# Altium PCB OpenTag3.PcbDoc
Units mil, origin at the board's own origin, x right, y up, seen from the top; angles counter-clockwise.
Board outline 2748.78 x 1260.03 mil, 4 copper layers (Top Layer, Internal Plane 1, Internal Plane 2, Bottom Layer), stack 30.634 mil thick; 62 components, 47 nets, 244 pads, 66 vias.
Unrouted connection lines stored in the file: 1.
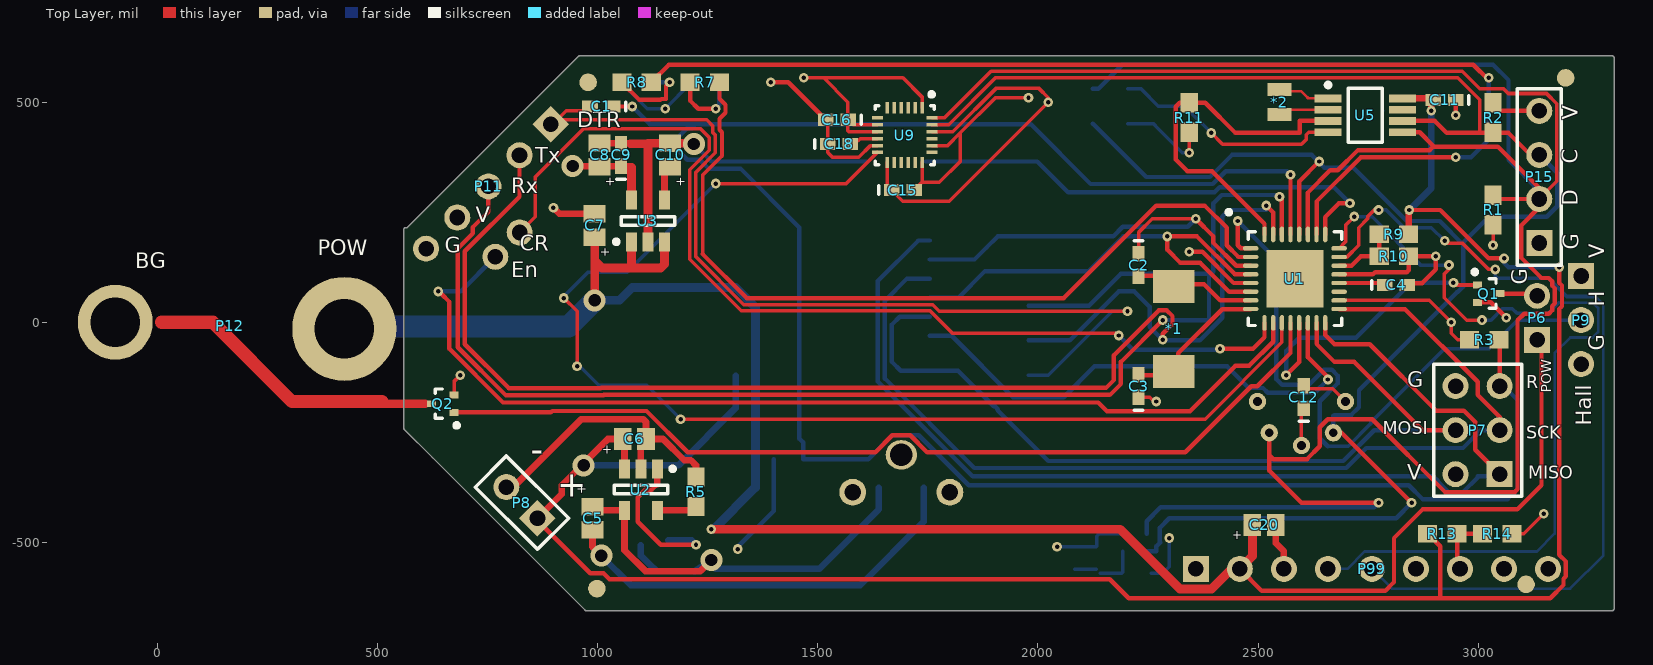
[diagram p0: Top Layer view]
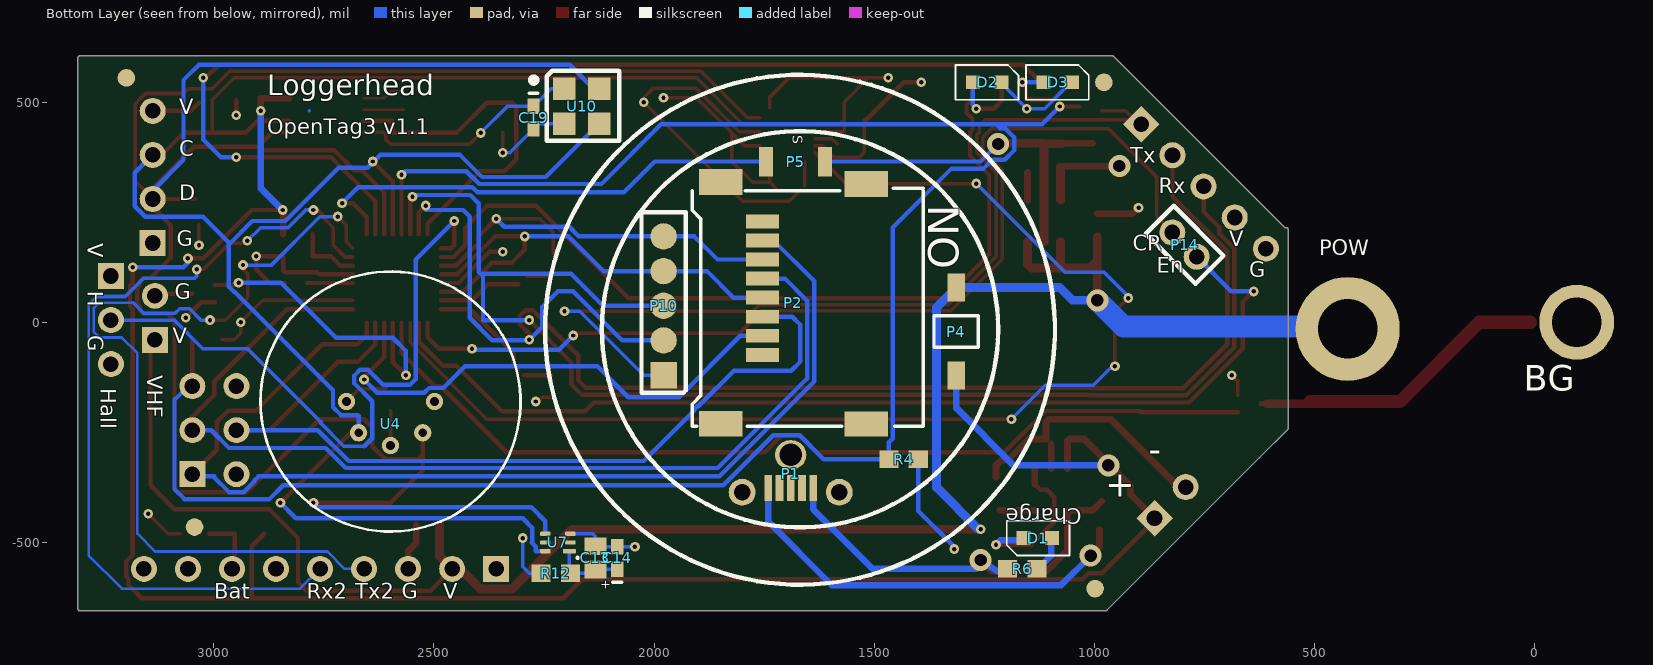
[diagram p1: Bottom Layer view, seen from below]
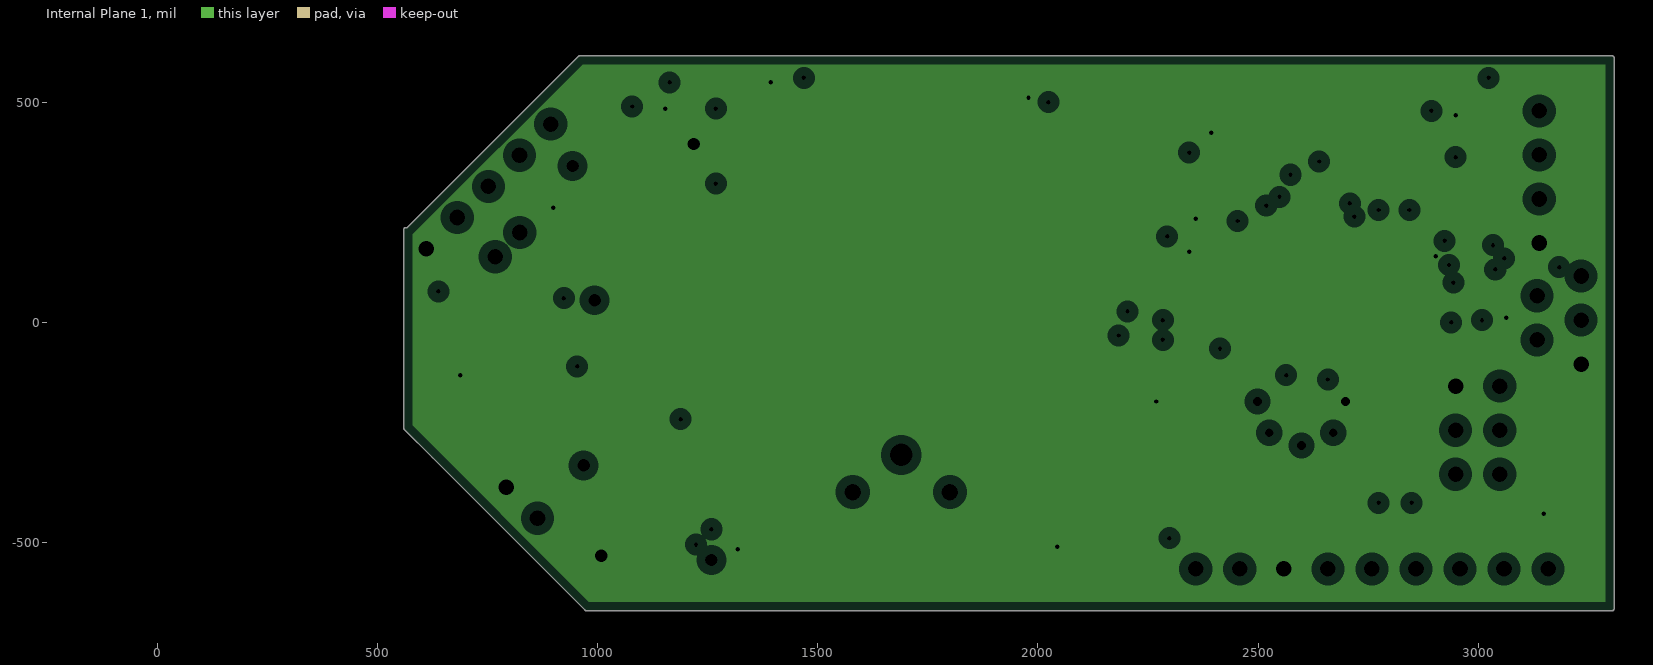
[diagram p2: Internal Plane 1, clearances drawn from the general rule]
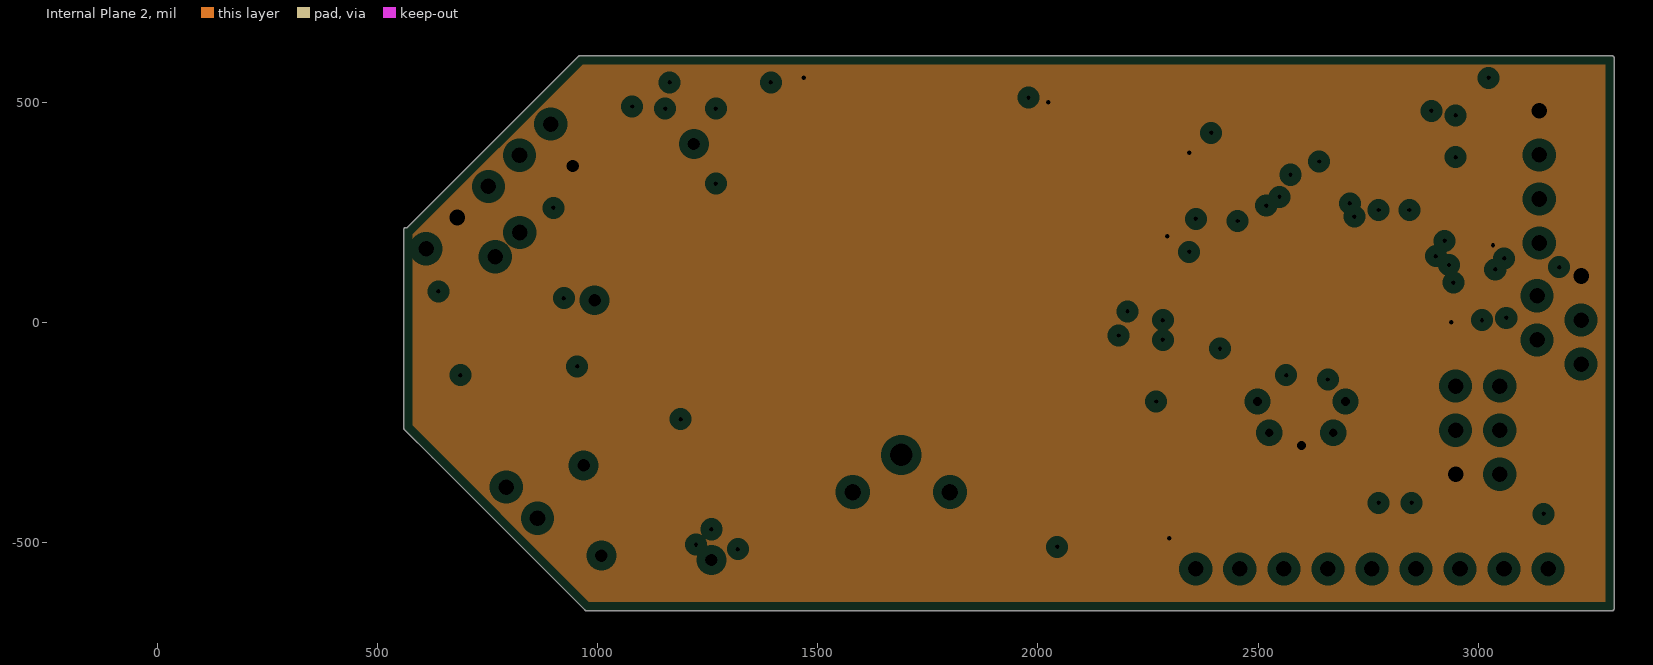
[diagram p3: Internal Plane 2, clearances drawn from the general rule]

## Layer stack, top to bottom
Top Solder: solder mask 0.4, Solder Resist, Dk 3.5
Top Layer: signal copper 1.4
Dielectric 1: core 10, FR-4, Dk 4.2
Internal Plane 1: plane copper 1.417, net GND
Dielectric 3: prepreg 5, Dk 4.2
Internal Plane 2: plane copper 1.417, net VCC
Dielectric 2: core 10, Dk 4.2
Bottom Layer: signal copper 1.4
Bottom Solder: solder mask 0.4, Solder Resist, Dk 3.5

## Board outline
561.47,-243.61 cw(c565,-240.05) 561.4,-243.55 cw(c564.95,-240) 559.99,-239.29 559.99,210 cw(c565,210) 567.31,214.45 956.4,603.55 956.39,603.53 cw(c959.95,600) 959.95,605.02 3303.7,605.02 cw(c3303.7,600) 3308.72,600 3308.72,-650 cw(c3303.7,-650) 3303.7,-655.01 974.95,-655.01 cw(c974.95,-650) 971.39,-653.53 971.4,-653.55 561.45,-243.6 561.4,-243.55 625.15,-307.3 ccw(c628.7,-303.75)

## Design rules (kind name [scope] priority, off if disabled: settings)
Clearance [All] p1: gap=6
PlaneClearance [All] p1: clearance=20
PlaneConnect [All] p1: planeconnectstyle=Relief reliefexpansion=20 reliefentries=4 reliefconductorwidth=10 reliefairgap=10
PolygonConnect [All] p1: connectstyle=Relief reliefconductorwidth=10 reliefentries=4 polygonreliefangle="90 Angle" airgapwidth=10
RoutingVias [All] p1: holewidth=28 width=50 viastyle="Through Hole" minholewidth=5 minwidth=10 maxholewidth=28 maxwidth=50
SolderMaskExpansion [All] p1: expansion=4
Width [All] p1: maxlimit=100 minlimit=6 preferedwidth=8
27 further rules are at their usual default settings.

## Classes and differential pairs
component class OpenTag3_Sensors: *2 C11 C12 C13 C14 C15 C16 C18 C19 C20 P9 P14 P99 R11 R12 R13 R14 U4 U5 U7 U9 U10
component class OpenTag3: *1 C1 C2 C3 C4 C5 C6 C7 C8 C9 C10 D1 D2 D3 P1 P2 P4 P5 P6 P7 P8 P10 P11 P12 P15 Q1 Q2 R1 R2 R3 R4 R5 R6 R7 R8 R9 R10 U1 U2 U3

## Components (designator, comment, footprint, x,y, rotation, side; value= is the part's Value field where it differs from the comment)
*1 "8MHz" XTAL-ABM3 2308.7,-15 r270 top
*2 "32.768kHz" XTAL-ABS06 2548.7,500 r90 top
C1 "0.1uF" 0402 1008.7,490 r180 top
C2 "100pF" 0402 2228.7,130 r270 top
C3 "100pF" 0402 2228.7,-145 r90 top
C4 "0.1uF" 0402 2813.7,85 r0 top
C5 "1uF" Tant0805 988.7,-445 r90 top
C6 "1uF" Tant0805 1083.7,-265 r180 top
C7 "1uF" Tant0805 993.7,220 r270 top
C8 "10uF" Tant0805 1004.7,380 r270 top
C9 "0.1uF" 0402 1053.7,380 r90 top
C10 "1uF" Tant0805 1164.7,380 r270 top
C11 "10nF" 0402 2923.7,505 r180 top
C12 "0.1uF" 0402 2603.7,-170 r90 top
C13 "1uF" Tant0805 2133.7,-535 r270 bottom
C14 "0.1uF" 0402 2083.7,-535 r90 bottom
C15 "0.1uF" 0402 1693.7,300 r0 top
C16 "10nF" 0402 1543.7,460 r180 top
C18 "0.1uF" 0402 1548.7,405 r0 top
C19 "0.1uF" 0402 2273.7,465 r270 bottom
C20 "1uF" Tant0805 2513.7,-460 r180 top
D1 "LED_0603" Diode0603 1128.7,-490 r0 bottom
D2 "LED_0603" Diode0603 1243.7,545 r180 bottom
D3 "LED_0603" Diode0603 1083.7,545 r180 bottom
P1 "microUSB-vert" MICROUSB-VERT 1638.7,-376 r0 bottom
P2 "microSD-Molex" microSD_Molex_hinged 1848.7,299 r180 bottom
P4 "DIP1" DIP1 1313.7,-121 r90 bottom
P5 "Tactile" Tactile-B3U-1000 1678.7,365 r0 bottom
P6 "Header 2" HDR1X2 3133.7,-40 r90 top
P7 "AVR SPI" HDR2X3 3048.7,-345 r90 top
P8 "Header 2" HDR1X2 863.7,-445 r135 top
P9 "Header 3" HDR1X3 3233.7,105 r270 top
P10 "Surface Pads" "Surface Pads 5 x 2mm" 1978.7,-120 r180 bottom
P11 "Header 5" HDR1X5 893.7,450 r225 top
P12 "Burn" BURN 425,0 r180 top
P14 "HDR_2x1_2mm" HDR_2x1_2mm 823.7,204.37 r315 bottom
P15 "Header 4" HDR1X4 3138.7,180 r90 top
P99 "Header 9" HDR1X9 2358.7,-560 r0 top
Q1 "DMN5L06TK-7" SOT-523 3023.7,65 r0 top
Q2 "DMN5L06TK-7" SOT-523 648.7,-185 r180 top
R1 "4.7k" 3-0603 3033.7,255 r270 top
R2 "4.7k" 3-0603 3033.7,465 r90 top
R3 "10k" 3-0603 3013.7,-40 r180 top
R4 "omit" 3-0603 1433.7,-311 r180 bottom
R5 "2k" 3-0603 1223.7,-385 r270 top
R6 "330X" 3-0603 1163.7,-560 r180 bottom
R7 "330" 3-0603 1243.7,545 r180 top
R8 "330" 3-0603 1088.7,545 r180 top
R9 "33k" 3-0603 2808.7,200 r0 top
R10 "100k" 3-0603 2808.7,150 r180 top
R11 "4.7k" 3-0603 2343.7,465 r90 top
R12 "100x" 3-0603 2223.7,-570 r180 bottom
R13 "33k" 3-0603 2918.7,-480 r180 top
R14 "100k" 3-0603 3043.7,-480 r180 top
U1 "ATmega8-16AC" 32M1-A_M 2583.7,99 r0 top
U2 "MCP73831T-2DCI/OT" SOT-23-OT5_N 1098.7,-380 r270 top
U3 "LP3985IM5-3.3" MF05A_N 1114.7,230 r90 top
U4 "Keller7LD" Keller7LD 2698.7,-180 r180 bottom
U5 "DS1342U" uSOP8 2743.7,470 r0 top
U7 "RGB light" ODFN 2218.7,-500 r0 bottom
U9 "MPU9250" MPU6500 1697.7,425 r270 top
U10 "MS5837" MS5837 2203.7,530 r180 bottom

## Footprints (in the part's own frame and the unit in brackets; to place one, negate y for a bottom-side part, rotate by r counter-clockwise, add the part's x,y. Pads: shape width x height; smd on the part's side, far side on the other; paste and mask are expansions set on the pad)
3-0603 [mm] "Chip Resistor; Body 1.6 x 0.9 mm (LxW typ)"
  rect 1.1x1 smd: 1(-0.85,0) 2(0.85,0)
32M1-A_M [mm] "QFN, 32-Leads, Body 5x5mm, Pitch 0.5mm, Thermal Pad 3.3x3.3mm, IPC Low Density"
  oval 0.9x0.25 smd: 1(-2.55,1.75) 2(-2.55,1.25) 3(-2.55,0.75) 4(-2.55,0.25) 5(-2.55,-0.25) 6(-2.55,-0.75) 7(-2.55,-1.25) 8(-2.55,-1.75) 17(2.55,-1.75) 18(2.55,-1.25) 19(2.55,-0.75) 20(2.55,-0.25) 21(2.55,0.25) 22(2.55,0.75) 23(2.55,1.25) 24(2.55,1.75)
  oval 0.25x0.9 smd: 9(-1.75,-2.55) 10(-1.25,-2.55) 11(-0.75,-2.55) 12(-0.25,-2.55) 13(0.25,-2.55) 14(0.75,-2.55) 15(1.25,-2.55) 16(1.75,-2.55) 25(1.75,2.55) 26(1.25,2.55) 27(0.75,2.55) 28(0.25,2.55) 29(-0.25,2.55) 30(-0.75,2.55) 31(-1.25,2.55) 32(-1.75,2.55)
  rect 3.3x3.3 smd paste-1.27: 33(0,0)
  silkscreen extent -3.93,-2.7 2.7,3.96, body extent -2.55,-2.55 2.55,2.55, height 1
0402 [mm] "Chip Capacitor; Body 1.0 x 0.5 mm (LxW typ)"
  rect 0.9x0.7 smd: 1(-0.65,0) 2(0.65,0)
  silkscreen extent -1.4,-0.25 -1.4,0.25
BURN [mil]
  round 236.22 hole 134.65: 1(0,15)
  round 170 hole 112: 2(520,0)
Diode0603 [mm]
  rect 0.8x0.8 smd: A(-0.825,0) K(0.825,0)
  silkscreen extent -1.83,-1 1.8,1
DIP1 [mm]
  rect 1.6x1 smd: 1(0,0) 2(5.08,0)
  silkscreen extent 1.63,-1.25 3.45,1.29
HDR1X2 [mm] "Connector; Header; 2 Position"
  rect 1.5x1.5 hole 0.9: 1(0,0)
  round 1.5 hole 0.9: 2(2.54,0)
HDR1X3 [mm] "Connector; Header; 3 Position"
  rect 1.5x1.5 hole 0.9: 1(0,0)
  round 1.5 hole 0.9: 2(2.54,0) 3(5.08,0)
HDR1X4 [mm] "Connector; Header; 4 Position"
  rect 1.5x1.5 hole 0.9: 1(0,0)
  round 1.5 hole 0.9: 2(2.54,0) 3(5.08,0) 4(7.62,0)
  silkscreen extent -1.27,-1.27 8.89,1.27
HDR1X5 [mm] "Connector; Header; 5 Position"
  rect 1.5x1.5 hole 0.9: 1(0,0)
  round 1.5 hole 0.9: 2(2.54,0) 3(5.08,0) 4(7.62,0) 5(10.16,0)
HDR1X9 [mm] "Connector; Header; 9 Position"
  rect 1.5x1.5 hole 0.9: 1(0,0)
  round 1.5 hole 0.9: 2(2.54,0) 3(5.08,0) 4(7.62,0) 5(10.16,0) 6(12.7,0) 7(15.24,0) 8(17.78,0) 9(20.32,0)
HDR2X3 [mm] "Connector; Header; 3x2 Position"
  rect 1.5x1.5 hole 0.9: 1(0,0)
  round 1.5 hole 0.9: 2(0,2.54) 3(2.54,0) 4(2.54,2.54) 5(5.08,0) 6(5.08,2.54)
  silkscreen extent -1.27,-1.27 6.35,3.81
HDR_2x1_2mm [mm]
  round 1.5 hole 0.9: 1(0,0.016) 2(0,2)
  silkscreen extent -1.14,-1.02 1.14,3.05
Keller7LD [mm]
  round 1 hole 0.5: 1(5.08,0) 2(4.4,-1.8) 3(2.54,-2.54) 4(0.7,-1.8) 5(0,0)
  silkscreen extent -4.96,-7.5 10.04,7.5, body extent -4.94,-7.49 10,7.49, height 5.25
MF05A_N [mm] "SOT23, 5-Leads, Body 2.9x1.6mm, Pitch 0.95mm, Lead Span 2.8mm, IPC Medium Density"
  rect 1.1x0.65 smd: 1(-1.2,0.95) 2(-1.2,0) 3(-1.2,-0.95) 4(1.2,-0.95) 5(1.2,0.95)
  silkscreen extent -1.32,-1.55 0.25,1.95, body extent -0.9,-1.55 0.9,1.55, height 1.19
microSD_Molex_hinged [mm]
  rect 2.5x1.45 smd: 0(0,-13.45) 0(8.382,-13.462)
  rect 2.5x1.5 smd: 0(0,0.508) 0(8.382,0.381)
  rect 1.9x0.8 smd: 1(2.4,-9.475) 2(2.4,-8.375) 3(2.4,-7.275) 4(2.4,-6.175) 5(2.4,-5.075) 6(2.4,-3.975) 7(2.4,-2.875) 8(2.4,-1.775)
  silkscreen extent -1.65,-13.59 11.68,0.13
MICROUSB-VERT [mm] "Molex 05133-0011"
  rect 0.45x1.5 smd: 1(0,0) 2(0.65,0) 3(1.3,0) 4(1.95,0) 5(2.6,0)
  round 1.55 hole 0.95: ""(-1.5,0.25) ""(4.1,0.25)
  oval 1.8x1.7 hole 1.3: ""(1.3,-1.9)
  body extent -2.67,-3.05 5.35,1.4, height 7.53
MPU6500 [mm] "QFN, 24-Leads, Body 3.00x3.00mm, Pitch 0.40mm, Thermal Pad 1.54x1.54mm, IPC Medium Density"
  rect 0.65x0.2 smd: 1(-1.575,1) 2(-1.575,0.6) 3(-1.575,0.2) 4(-1.575,-0.2) 5(-1.575,-0.6) 6(-1.575,-1) 13(1.575,-1) 14(1.575,-0.6) 15(1.575,-0.2) 16(1.575,0.2) 17(1.575,0.6) 18(1.575,1)
  rect 0.2x0.65 smd: 7(-1,-1.575) 8(-0.6,-1.575) 9(-0.2,-1.575) 10(0.2,-1.575) 11(0.6,-1.575) 12(1,-1.575) 19(1,1.575) 20(0.6,1.575) 21(0.2,1.575) 22(-0.2,1.575) 23(-0.6,1.575) 24(-1,1.575)
  silkscreen extent -2.47,-1.7 1.7,1.7, body extent -1.85,-1.25 1.25,1.85, height 0.9
MS5837 [mm]
  rect 1.3x1.3 smd: 1(0,0) 2(0,-2) 3(2,-2) 4(2,0)
  silkscreen extent -1.96,-3 3.15,1.05
ODFN [mm]
  rrect50% 0.75x0.25 smd: 1(-0.67,0.5)
  rrect50% 0.6x0.25 smd: 2(-0.72,0) 3(-0.72,-0.5) 4(0.72,-0.5) 5(0.72,0) 6(0.72,0.5)
  silkscreen extent -1.19,0.84 -1.09,0.94, body extent -0.82,-0.82 0.82,0.82, height 0.7
SOT-23-OT5_N [mm] "SOT23, 5-Leads, Body 2.9x1.7mm, Pitch 0.95mm, Lead Span 2.8mm, IPC Medium Density"
  rect 1.1x0.65 smd: 1(-1.2,0.95) 2(-1.2,0) 3(-1.2,-0.95) 4(1.2,-0.95) 5(1.2,0.95)
  silkscreen extent -1.32,-1.55 0.25,1.95, body extent -0.9,-1.55 0.9,1.55, height 1.45
SOT-523 [mm] "For Diodes Inc MOSFET DMN5L06TK"
  rect 0.51x0.4 smd: 1(-0.65,0.5) 2(-0.65,-0.5) 3(0.65,0)
  silkscreen extent -0.92,-0.85 0.42,1.37, body extent -0.43,-0.85 0.42,0.85, height 0.8
"Surface Pads 5 x 2mm" [mil]
  rect 60x60 smd paste-50: 1(0,0.04)
  round 60 smd paste-50: 2(0,78.78) 3(0,157.52) 4(0,236.26) 5(0,315)
  silkscreen extent -50,-40 50,370
Tactile-B3U-1000 [mm]
  rect 0.8x1.7 smd: 1(-1.7,0) 2(1.7,0)
Tant0805 [mil]
  rect 40x50 smd: 1(-26.5,0) 2(26.5,0)
uSOP8 [mm]
  rect 1.55x0.45 smd: 1(-2.15,0.975) 2(-2.15,0.325) 3(-2.15,-0.325) 4(-2.15,-0.975) 5(2.15,-0.975) 6(2.15,-0.325) 7(2.15,0.325) 8(2.15,0.975)
  silkscreen extent -2.27,-1.55 0.97,1.87, body extent -1.45,-1.55 1.45,1.55, height 1.1
XTAL-ABM3 [mm]
  rect 1.9x2.4 smd: 1(-2.45,0) 2(2.45,0)
XTAL-ABS06 [mm]
  rect 0.75x1.4 smd: 1(-0.725,0) 2(0.725,0)

## Part data
*1: library part XTAL-ABM3
*2: library part XTAL_ABS06
C1 C2 C3 C4 C9 C11 C12 C14 C15 C16 C18 C19: library part C0402, "Ceramic Chip Capacitor - Standard"
C5 C6 C7 C8 C10 C13 C20: library part Tant0805
P1: "Molex 105133-0011"
P2: library part microSD_Molex_hinged
P5: library part Tactile_B3U-1000
P6 P8: "Header, 2-Pin"
P7: library part "Header 3X2", "Header, 3-Pin, Dual row"
P9: "Header, 3-Pin"
P10: library part "SurfacePads 5x2mm"
P11: "Header, 5-Pin"
P12: library part "Burn Screw"
P15: "Header, 4-Pin"
P99: "Header, 9-Pin"
Q1 Q2: library part "FET DMN5L06TK-7", "Ultra-low leakage Enhanced MOSFET"
R1 R2 R3 R4 R5 R6 R7 R8 R9 R10 R11 R12 R13 R14: library part ERJ3RK, "Precision Thick Film Chip Resistor, 10 Ohm to 1M Ohm Range, 1% and 0.5% Tolerance, 0603 Size, 0.063 W"
U1: "8-Bit AVR Microcontroller with 8K Bytes of In-System Programmable Flash Memory"
U2: "Miniature Single-Cell, Fully Integrated Li-Ion, Li-Polymer Charge Management Controller, 4.2V, 5-Pin SOT-23, Industrial Temperature, Tape and Reel"
U3: "Micropower, 150mA Low-Noise Ultra Low-Dropout CMOS Voltage Regulator"
U4: library part "Keller 7LD", "Keller Pressure/Temp"
U5: library part DS1337
U7: library part ISL29125, "RGB light sensor"
U9: library part MPU-9250, "Invensense"
U10: "Pressure/Temp"

## Free pads (board coordinates)
  round 40 smd paste-20 mask+5: 0(978.7,545) 0(998.7,-605) 0(3108.7,-595) 0(3198.7,555)
  round 40 smd far side paste-20 mask+5: 0(978.7,545) 0(998.7,-605) 0(3043.7,-465) 0(3198.7,555)

## Via types
v1: diameter 22, hole 10, Top Layer to Bottom Layer, 60 vias
v2: diameter 50, hole 28, Top Layer to Bottom Layer, 6 vias

## Nets (pads, with @x,y where several pads share a name; then routed paths per layer and width w, separated by ;. In a path a pad name is that pad's centre, name@x,y a point inside that pad or via, vN(x,y) a via of type N, cw(c..) or ccw(c..) an arc to the next point about the centre after c; other vN are vias at no path point)
BATV: R9.1 R10.2 U1.22 | length 150
  Top Layer w10: U1.22 2712.23,128.53 2733.7,150 R10.2 R9.1
BURN: Q2.1 U1.12 | length 2133
  Top Layer w10: Q2.1 894.02,-204.68 897.2,-201.5 1111.36,-201.5 1204.86,-295 1631.23,-295 1669.5,-256.73 1710.27,-256.73 1748.54,-295 2334.65,-295 2484.33,-145.31 2498.39,-145.31 2573.86,-69.84 U1.12
BURN_GND: P12.2 Q2.3 | length 689.7
  Top Layer w10: 608.7,-185 Q2.3
  Top Layer w20: 510,-180 515,-185 608.7,-185
  Top Layer w30: 10,0 126.3,0 306.3,-180 510,-180
CAMRST: P14.1 U1.9 | length 2311
  Top Layer w8: P14.1@823.7,204.37 858.7,239.37 858.7,330 968.7,440 1233.2,440 1253.7,419.5 1253.7,390.5 1209.7,346.5 1209.7,142.99 1326.69,26 1755.15,26 1806.15,-25 v1@2178.7,-25
  Top Layer w10: v1(2413.7,-60) 2488.7,-60 2514.8,-33.9 U1.9
  Bottom Layer w10: v1(2183.7,-30) 2215.7,-62 2411.7,-62 v1(2413.7,-60)
CS: P2.2 U1.14 | length 1170.9
  Top Layer w10: U1.14 2613.23,-79.53 v1@2658.7,-125
  Bottom Layer w10: P2.2 1804.42,-30.72 1943.7,-170 2058.7,-170 2128.7,-100 2429.81,-100 2479.13,-149.31 2511.41,-149.31 2522.1,-160 2628.7,-160 v1(2658.7,-130)
D+: P1.3
D-: P1.2
DTR: C1.2 P10.1 P11.1 | length 2090
  Top Layer w8: P11.1@898.7,450 928.7,480 C1.2@983.11,480 ; P11.1@908.7,460 1247.96,460 1262.17,445.8 1262.17,430.83 1267.7,425.3 1267.7,384.7 1223.7,340.7 1223.7,148.79 1332.49,40 1760.95,40 1775.95,25 v1(2203.7,25)
  Bottom Layer w8: P10.1 2023.74,-119.96 2168.7,25 v1(2203.7,25)
EN: P14.2 U1.10 | length 2332.6
  Top Layer w10: v1@645,65 663.7,46.3 663.7,-60.25 785.56,-182.11 2137.07,-182.11 2156.96,-202 2345.59,-202 2448.59,-99 2479.7,-99 2534.49,-44.21 U1.10
  Bottom Layer w10: v1(638.7,70) 689.33,70 P14.2
GND: C2.1 C3.1 C4.2 C5.1 C6.1 C7.1 C8.1 C9.2 C10.1 C11.1 C12.2 C13.1 C14.2 C15.2 C16.2 C18.1 C19.1 C20.1 D2.K D3.K P1.5 P2.6 P5.1 P7.6 P8.2 P9.3 P10.5 P11.5 P15.1 P99.3 Q1.2 Q2.2 R4.2 R5.1 R10.1 R14.1 U1.3 U1.5 U1.21 U2.2 U3.2 U4.5 U5.4 U7.3 U9.11 U9.18 U9.20 U10.1 | length 6617
  Top Layer w8: Q2.2 674.29,-134.41 v1(688.7,-120) ; C16.2@1523.11,460 C18.1 1523.11,385.59 1533.7,375 1593.7,375 1620.08,401.38 U9.11 ; C15.2 1737.07,317.78 ; U9.18 1737.07,317.78 ; U9.20 1795.08,401.38 1823.7,430 ; v1@1973.7,510 1903.7,510 1823.7,430 ; C3.1 2254.29,-170.59 2268.7,-185 v1(2268.7,-180) ; C2.1 2228.7,203.79 2259.91,235 v1(2358.7,235) ; v1(2393.7,430) 2419.37,404.33 2598.7,404.33 2609.37,415 2609.37,425.67 2615.31,431.61 U5.4 ; C12.2 2610.29,-151 2669.7,-151 U4.5 ; R14.1 3103.7,-480 v1(3148.7,-435) ; 1737.07,317.78 1776.48,317.78 1823.7,365 1823.7,430
  Top Layer w10: v1(1393.7,545) 1433.11,545 C16.2 ; v1(2343.7,160) 2373.7,160 2444.54,89.16 U1.5 ; v1(2358.7,235) 2398.7,195 2398.7,180.25 2450.43,128.53 U1.3 ; U1.21 2760.9,108.84 2765.84,113.78 2837.48,113.78 2842.17,118.46 R10.1 v1(2903.7,150) 2903.7,120 2872.7,89 C4.2@2839.29,89 ; v1@2949.29,470 C11.1@2949.29,504.41 ; Q1.2 3028.39,45.31 v1(3063.7,10)
  Top Layer w15: P8.2 809.41,-374.29 963.7,-220 1103.7,-220 1110.2,-226.5 C6.1 1148.7,-265 1197.2,-313.5 1212.2,-313.5 1223.7,-325 R5.1 ; v1(900,260) 913.5,246.5 C7.1 ; C5.1 988.7,-510 v2(1008.7,-530) ; C8.1 1073.79,406.5 ; U2.2 C6.1@1098.7,-276.5 ; C20.1 2540.2,-501.5 2558.7,-520 P99.3
  Top Layer w20: 1074.7,405.59 1111.29,405.59 ; U3.2 1114.7,406.5 C10.1 v2@1217.2,406.5
  Bottom Layer w8: D3.K 1053.4,545 1113.4,485 v1(1153.7,485) 1211.22,542.52 D2.K ; 1881.87,168.75 1882.45,168.75 ; v1@2044.29,-509.41 C14.2 C13.1@2132.79,-509.41 ; C13.1 2133.7,-485.63 2139.02,-480.31 U7.3 ; U10.1 2234.29,530 C19.1 2333.11,490.59 v1(2393.7,430)
  Bottom Layer w10: v2(1218.7,405) 1258.7,365 P5.1 ; v1@1318.7,-510 1400.24,-428.47 R4.2 ; P2.6 1856.21,142.5 1882.45,168.75 1908.7,195 P10.5 2171.07,195 2193.07,217 2340.7,217 v1(2358.7,235)
  Bottom Layer w15: v2(1008.7,-530) 1075.89,-597.19 1596.52,-597.19 1741.06,-452.64 P1.5
  other v1: 1318.7,-515 2043.7,-510 2948.7,470 1978.7,510
GPSBAT: P99.7 R13.1 R14.2 | length 131.5
  Top Layer w10: P99.7@2952.17,-553.46 R13.1 R14.2
HALL: P9.2 U1.1 | length 1537.5
  Top Layer w10: v1(2453.7,230) 2453.7,175 2460.8,167.9 U1.1
  Bottom Layer w8: 2658.43,-281.55 2704.52,-281.55 2756.6,-229.47 ; 2756.6,-226.78 2923.38,-60 3024.81,-60 3089.26,4.44 ; 3088.7,5 P9.2@3243.7,5
  Bottom Layer w10: v1(2453.7,230) 2541.7,142 2541.7,-129.11 2554.59,-142 2615.59,-142 2649.59,-108 2667.81,-108 2680.7,-120.89 2680.7,-139.11 2640.46,-179.36 2640.46,-263.58 2658.43,-281.55 ; 2756.6,-229.47 2756.6,-226.78
IMU_INT: U1.11 U9.12 | length 2780.5
  Top Layer w8: v1(923.7,55) 953.7,25 v1(953.7,-100) ; v1(1188.7,-220) 2379.91,-220 2554.17,-45.74 U1.11 ; v1(1268.7,315) 1565.06,315 U9.12
  Bottom Layer w8: v1@925,60 978.11,113.11 1066.81,113.11 v1(1268.7,315) ; v1@955,-95 1003.11,-143.11 1111.81,-143.11 v1(1188.7,-220)
INTA: R11.2 U1.32 U5.3 | length 811.4
  Top Layer w10: U1.32 2514.8,223.9 2395.7,343 2339.59,343 2313.02,369.57 2313.02,489.31 2322.17,498.46 R11.2 2380.24,498.46 2448.7,430 2593.7,430 2594.37,430.67 2594.37,457.2 U5.3
LED1: R7.1 U1.2 | length 1866.5
  Top Layer w8: 1238.7,155 1238.7,334.49 1282.7,378.49
  Top Layer w10: 1238.7,155 1338.7,55 2058.7,55 2268.7,265 2378.7,265 2428.7,215 2428.7,175 2455.49,148.21 U1.2 ; R7.1 1277.17,507.65 1290.7,494.11 1290.7,475.89 1277.17,462.35 1277.17,437.05 1282.7,431.51 1282.7,378.49
LED2: R8.1 U1.26 | length 2596.5
  Top Layer w10: R8.1 1162.17,585 2988.7,585 v1@3023.7,550 ; U1.26 2632.91,274.21 2733.7,375 v1(2948.7,375)
  Bottom Layer w10: v1(2948.7,375) 2983.7,375 3023.7,415 v1(3023.7,555)
MISO: P2.7 P7.1 U1.16 | length 2533.7
  Top Layer w10: U1.16 2652.6,-28.9 2673.7,-50 2753.7,-50 2904.17,-200.47 2967.14,-200.47 2993.23,-226.56 2993.23,-289.53 P7.1
  Bottom Layer w10: P2.7 1728.81,185.81 1636.7,93.7 1636.7,-134.47 1852.23,-350 2898.7,-350 2908.17,-359.47 2908.17,-361.79 2931.91,-385.53 2965.49,-385.53 2998.7,-352.31 2998.7,-350 3048.7,-350 P7.1 P7.1@3028.7,-345
MOSI: P2.3 P7.4 U1.15 | length 2026.3
  Top Layer w10: U1.15 2632.91,-49.21 2673.7,-90 2718.7,-90 2873.7,-245 P7.4
  Bottom Layer w10: P2.3 1686.28,12.58 1668.7,-5 1668.7,-90 1688.7,-110 1818.7,-110 1899.68,-190.98 1902.47,-190.98 1908.91,-197.43 1908.91,-200.21 2023.7,-315 2693.7,-315 2763.7,-245 P7.4
Net*1_1: *1.1 C2.2 U1.7 | length 245.7
  Top Layer w10: C2.2@2233.7,105.59 *1.1@2289.57,105.59 ; *1.1@2308.7,86.46 2377.24,86.46 2413.91,49.79 U1.7
Net*1_2: *1.2 C3.2 U1.8 | length 307.4
  Top Layer w10: C3.2@2233.7,-120.59 *1.2@2294.57,-120.59 ; *1.2@2308.7,-106.46 2318.7,-96.46 2318.7,-70 2418.49,29.79 U1.8@2483.31,29.79
Net*2_1: *2.1 U5.2 | length 90.4
  Top Layer w6: *2.1@2568.7,482.8 U5.2
Net*2_2: *2.2 U5.1 | length 93
  Top Layer w6: *2.2@2573.7,525 2597.24,525 2612.26,509.98 ; 2612.26,510.78 2612.26,509.98 ; U5.1 2613.86,508.39 2612.26,509.98
NetC4_1: C4.1 U1.20 | length 103.9
  Top Layer w10: U1.20 C4.1@2787.95,89.16
NetC10_2: C10.2 U3.4 | length 63.7
  Top Layer w15: U3.4 C10.2@1152.1,340.9
NetC13_2: C13.2 C14.1 R12.2 U7.1 | length 145.4
  Bottom Layer w8: C14.1 C13.2@2132.79,-560.59 ; C13.2@2142.2,-570 R12.2 ; R12.2@2192.32,-567.91 U7.1
NetC18_2: C18.2 U9.10 | length 56.4
  Top Layer w8: C18.2@1584.29,405 1596.42,417.13 U9.10
NetD1_A: D1.A R6.2 | length 70.1
  Bottom Layer w15: 1098.7,-506 1098.7,-530 1130.24,-561.54 R6.2
NetD1_K: D1.K U2.1 | length 367.7
  Top Layer w10: 1136.1,-367.6 1123.7,-380 1108.7,-380 1091.59,-397.11 1091.59,-452.89 1143.7,-505 v1(1223.7,-505)
  Top Layer w15: 1136.1,-367.6 U2.1
  Bottom Layer w15: D1.K@1161.18,-495 1213.7,-495 v1(1223.7,-505)
NetD2_A: D2.A R7.2 | length 170.7
  Top Layer w10: R7.2 1210.24,503.46 1228.7,485 v1(1268.7,485)
  Bottom Layer w10: v1(1268.7,485) 1276.18,492.48 D2.A
NetD3_A: D3.A R8.2 | length 206.7
  Top Layer w10: R8.2 1095.24,505 1142.59,505 1144.59,507 1155.7,507 1155.7,537 v1(1163.7,545)
  Bottom Layer w10: D3.A v1(1163.7,545)
NetR5_2: R5.2 U2.5 | length 78.8
  Top Layer w15: U2.5 R5.2@1214.92,-427.24
POW: C6.2 C11.2 P4.1 P8.1 R9.2 R13.2 U2.3 U5.8 | length 4922.7
  Top Layer w10: P8.1 858.7,-445 983.7,-570 1013.7,-570 1027.2,-583.5 2163.2,-583.5 2206.23,-626.53 2913.7,-626.53 ; v1(2843.7,255) 2913.7,255 3023.7,145 v1(3058.7,145) ; R13.2 2913.7,-508.46 2913.7,-626.53 ; v1(3183.7,125) 3183.7,89.94 3190.23,83.41 3190.23,36.59 3183.7,30.06 3183.7,-527.69 3199.23,-543.21 3199.23,-576.79 3193.7,-582.31 3193.7,-596.53 3163.7,-626.53 2913.7,-626.53
  Top Layer w15: P8.1 918.7,-390 918.7,-370 1023.7,-265 C6.2 ; U2.3 C6.2@1061.3,-269.1 ; U5.8 C11.2@2893.7,508.39 ; R9.2 v1@2842.17,253.46 ; v1(2893.7,480) C11.2@2893.7,500.59
  Bottom Layer w10: v1(3058.7,145) 3058.7,135 3068.7,125 v1(3183.7,125)
  Bottom Layer w15: v2(968.7,-325) 1183.7,-325 1313.7,-195 P4.1 ; v1(2843.7,255) 2893.7,305 v1(2893.7,480)
PPS: P99.1
RESET: C1.1 P7.5 R3.1 R4.1 U1.29 | length 4901.7
  Top Layer w10: C1.1 v1(1078.7,490) ; U1.29 v1@2573.86,335 ; P7.5 R3.1@3048.7,-41.54
  Bottom Layer w10: v1(1078.7,490) 1118.7,450 ; v1(2573.7,335) 2565.7,343 2426.45,343 2397.45,314 2119.7,314 1983.7,450 1118.7,450 ; P7.5@3053.7,-141 3088.2,-175.5 3089.23,-174.47 3089.23,-379.08 3066.78,-401.53 2873.7,-401.53 2842.17,-370 1842.98,-370 1729.71,-256.73 1669.5,-256.73 1615.23,-311 R4.1 1467.16,-272.78 1458.49,-264.1 1458.49,215.21 1324.7,349 1252.07,349 1232.07,369 1203.79,369 1182.7,390.09 1182.7,419.91 1203.79,441 1214.7,441 1223.7,450 1118.7,450
RXD: P10.3 P11.3 U1.30 | length 3203.2
  Top Layer w10: P11.3 752.28,251.26 717.17,216.16 717.17,202.16 682.7,167.68 682.7,-56.63 792.18,-166.11 1013.81,-166.11 1014.92,-165 2163.7,-165 2188.7,-140 2188.7,-90 v1(2283.7,5) ; U1.30 v1@2554.17,285
  Bottom Layer w10: P10.3 2116.22,37.52 2188.7,110 2388.7,110 2388.7,5 v1(2283.7,5) ; 2388.7,105 2398.7,115 2398.7,270 2417.7,289 v1@2548.7,289
  other v1: 2548.7,285
RXD2: P99.5 U1.23 | length 1906.5
  Top Layer w8: U1.23 2701.91,148.21 2728.7,175 2728.7,215 2748.7,235 2748.7,240 2763.7,255 v1(2773.7,255) ; v1@2928.7,180 2963.7,180 3023.7,120 v1(3038.7,120)
  Bottom Layer w6: P99.5 2803.7,-605 3208.7,-605 3284.23,-529.47 3284.23,40.17 3265.87,58.53
  Bottom Layer w8: v1(2773.7,255) 2791.37,255 2831.37,215 2893.7,215 v1(2923.7,185) ; v1(3038.7,120) 3038.7,105 3044.17,99.53 3160.07,99.53 3201.07,58.53 3265.87,58.53
SCK: P2.5 P7.3 U1.17 | length 2328.5
  Top Layer w10: U1.17@2684.09,29.87 2833.83,29.87 2998.7,-135 2998.7,-165 3048.7,-215 P7.3
  Bottom Layer w10: P2.5 1702.9,99.2 1652.7,49 1652.7,-127.84 1855.86,-331 2700.33,-331 2745.8,-285.53 2965.49,-285.53 3006.02,-245 P7.3
SCL: P15.3 R2.1 U1.28 U4.4 U5.6 U7.6 U9.23 U10.3 | length 4779.7
  Top Layer w8: U9.23 1797.32,448.62 1903.7,555 2953.7,555 3003.7,505 3003.7,430
  Top Layer w10: U1.28 2593.54,319.84 v1(2638.7,365) ; U4.4 2689.57,-250.87 v1(2848.7,-410) ; U5.6 2901.5,457.2 2928.7,430 3068.7,430 3118.7,380 P15.3
  Bottom Layer w10: U10.3 2246.22,330 2390.82,330 2440.82,380 2621.77,380 2650.48,351.28 2716.3,351.28 2837.59,230 2912.59,230 2965.7,176.89 2965.7,80.89 2952.81,68 2951.7,68 2729.39,-154.31 2729.39,-192.71 2711.41,-210.69 2673.02,-210.69 2671.14,-212.56 U4.4 ; U7.6 2269.02,-519.68 2269.02,-508.88 ; 2269.86,-508.04 2277.74,-500.15 2276.7,-499.11 2276.7,-467 2298.7,-445 2813.7,-445 v1(2848.7,-410) ; 2963.7,178.89 3024.29,239.47 3155.49,239.47 3179.23,263.21 3179.23,339.47 P15.3
SDA: P15.2 R1.1 U1.27 U4.2 U5.5 U7.4 U9.24 U10.4 | length 6337
  Top Layer w8: U9.24 1788.07,464.37 1893.7,570 2963.7,570 3003.58,530.12 3057.53,530.12 3068.12,519.53 3155.07,519.53 3178.7,495.9 3178.7,320 P15.2
  Top Layer w10: U4.2 2525.47,-301.77 ; U1.27 2613.23,294.53 2663.7,345 2681.07,345 2727.07,391 2889.7,391 2898.7,400 ; v1(2773.7,-410) 2598.7,-410 2525.47,-336.77 2525.47,-301.77 ; U5.5 2867.09,431.61 2898.7,400 ; R1.1@3043.7,280 P15.2 ; 2525.47,-301.77 2534.39,-310.69 2611.41,-310.69 2640.46,-281.64 2640.46,-238.16 2658.43,-220.18 2759.38,-220.18 2924.73,-385.53 3082.78,-385.53 3089.23,-379.08 3089.23,4.41 3104.29,19.47 3160.49,19.47 3167.7,26.69 3167.7,36.69 3174.23,43.21 3174.23,76.79 3167.7,83.31 3167.7,93.31 3160.49,100.53 3143.56,100.53 3098.17,145.92 3098.17,220.53 3138.7,261.06 P15.2 ; 2898.7,400 2899.82,398.88 3044.82,398.88 3138.7,305 P15.2
  Bottom Layer w10: U10.4 2136.96,530 2191.96,585 3033.7,585 3068.7,550 3068.7,368.94 3138.7,298.94 P15.2 ; U7.4 2247.05,-451.65 2278.7,-420 2763.7,-420 v1(2773.7,-410)
SPOW: C7.2 C20.2 P4.2 P6.1 P12.1 P99.2 U3.1 U3.3 | length 4429.8
  Top Layer w10: P99.2 2508.7,-610 2788.7,-610 2808.7,-590 2808.7,-490 2873.7,-425 3088.7,-425 3143.7,-370 P6.1@3143.7,-40
  Top Layer w20: v2(993.7,49.96) 993.7,140 ; C7.2 993.7,140 ; 1077.3,124.6 U3.1 ; U3.3 1152.1,131.6 1143.7,123.2 1010.5,123.2 993.7,140 ; v1(1258.7,-470) 2187.02,-470 2322.55,-605.53 2394.86,-605.53 2440.38,-560 P99.2 2487.2,-531.5 C20.2
  Bottom Layer w20: v2(993.7,49.96) 1049.96,49.96 1079,79 P4.2 1358.7,34 1358.7,-375 v1@1263.7,-470
  Bottom Layer w50: P12.1@530,-10 933.74,-10 v2(993.7,49.96)
STOP: P5.2 U1.25 | length 1120.9
  Top Layer w10: U1.25 2652.6,238.9 2683.7,270 v1(2708.7,270)
  Bottom Layer w10: P5.2 1998.7,365 2068.7,295 2401.07,295 2413.07,307 2671.7,307 v1(2708.7,270)
TXD: P10.2 P11.2 U1.31 | length 3290.4
  Top Layer w10: P11.2 822.99,285.34 698.7,161.06 698.7,-50 798.81,-150.11 1007.18,-150.11 1008.29,-149 2154.7,-149 2172.7,-131 2172.7,-74.89 2274.59,27 2292.81,27 2305.7,14.11 2305.7,-4.11 2283.7,-26.11 v1(2283.7,-40) ; v1(2518.7,265) 2534.49,249.21 U1.31
  Bottom Layer w10: P10.2 2072.48,-41.22 2183.7,70 2218.7,70 2253.7,35 2253.7,-10 v1(2283.7,-40) ; v1@2284.92,-41.22 2367.48,-41.22 2418.7,10 2418.7,240 2433.7,255 v1@2518.7,255
TXD2: P99.4 U1.24 | length 1958.3
  Top Layer w8: U1.24 2698.7,182.5 2698.7,220 v1(2718.7,240) ; v1(2933.7,130) 2933.7,120.7 2922.7,109.7 2922.7,56 2973.7,5 v1(3008.7,5)
  Bottom Layer w6: P99.4 2702.8,-560 2742.33,-520.47 3133.23,-520.47 3173.7,-480 3173.7,-70 3209.17,-34.53 3260.07,-34.53 3272.23,-22.37 3272.23,32.37 3260.07,44.53 3183.23,44.53
  Bottom Layer w8: v1(2718.7,240) 2759,240 2870,129 2912.4,129 2913.4,130 v1(2933.7,130) ; v1(3008.7,5) 3029,5 3055,31 3077.7,31 3088.23,20.47 3159.17,20.47 3183.23,44.53
VBUS: C5.2 P1.1 R6.1 U2.4 | length 938.9
  Top Layer w15: C5.2@983.7,-406.5 1004.44,-427.24 U2.4 1061.3,-517.6 1108.7,-565 1233.7,-565 v2(1258.7,-540)
  Bottom Layer w15: 1220.24,-565 v2(1258.7,-540) ; v2@1258.7,-550 1268.7,-560 1503.7,-560 1638.7,-425 P1.1
VCC: C8.2 C9.1 C12.1 C15.1 C16.1 C19.2 P2.4 P7.2 P9.1 P10.4 P11.4 P15.4 R1.2 R2.2 R3.2 R11.1 R12.1 U1.4 U1.6 U1.18 U3.5 U4.3 U9.1 U9.8 U9.9 U9.13 U9.22 U10.2 | length 3629.1
  Top Layer w8: v1(1468.7,555) 1513.7,555 ; U9.9 1570.83,432.87 1568.7,435 C16.1@1568.7,460.59 ; U9.8 1580.67,448.62 C16.1 C16.1@1568.7,460.59 ; C15.1@1658.33,309.78 U9.13 ; C15.1 1693.11,275 1798.7,275 v1(2023.7,500) 2023.7,510 2002.7,531 1904.9,531 1806.78,432.87 U9.22 ; U9.1 1737.07,511.63 1693.7,555 1513.7,555 ; v1(2343.7,385) R11.1 ; U4.3 C12.1@2598.7,-200.59 ; U1.18 2888.91,49.79 v1(2938.7,0) 2938.7,-25 2953.7,-40 R3.2 ; v1(3033.7,175) R1.2 ; 1513.7,555 1568.7,500 C16.1@1568.7,460.59
  Top Layer w10: U1.6 2434.23,69.47 2368.84,134.86 2323.84,134.86 2293.7,165 v1(2293.7,195) 2361.33,195 2447.49,108.84 U1.4 ; R2.2 3052.17,480 P15.4
  Top Layer w15: v2@944.29,354.41 1074.7,354.41
  Top Layer w20: U3.5 1077.3,351.81
  Bottom Layer w8: U10.2 2261.85,451.26 C19.2 2328.11,385 v1(2343.7,385) ; R12.1 2283.7,-570 2298.7,-555 v1(2298.7,-490)
  Bottom Layer w10: P2.4 1819.59,55.89 1879.96,116.26 P10.4 2114.96,116.26 2193.7,195 v1(2293.7,195)
  other v2: 943.7,355
VHF: Q1.1 U1.13 | length 679.3
  Top Layer w10: v1(2563.7,-120) 2593.54,-90.16 U1.13 ; v1@2949.02,84.68 Q1.1
  Bottom Layer w10: v1(2563.7,-120) 2563.7,-65 2593.7,-35 2722.59,-35 2847.59,90 v1(2943.7,90)
VHF_GND: P6.2 Q1.3 | length 89.4
  Top Layer w10: Q1.3 P6.2@3138.7,65
pads on no net: P1. P1.4 P2.0 P2.1 P2.8 P99.6 P99.8 P99.9 U1.19 U1.33 U4.1 U5.7 U7.2 U7.5 U9.2 U9.3 U9.4 U9.5 U9.6 U9.7 U9.14 U9.15 U9.16 U9.17 U9.19 U9.21
copper on no net: | length 0.4
  Bottom Layer w8: 2783.11,480 2783.11,480.39

## Polygon pours and split planes (outlines as drawn)
GND on Internal Plane 1 (split plane): 3288.62,-634.92 981.2,-634.92 639.36,-293.09 640.25,-292.2 639.99,-292.1 639.2,-292.92 580.08,-233.8 580.08,199.06 581.52,200.24 966.2,584.92 3288.62,584.92
VCC on Internal Plane 2 (split plane): 3288.62,-634.92 981.2,-634.92 639.36,-293.09 640.25,-292.2 639.99,-292.1 639.2,-292.92 580.08,-233.8 580.08,199.06 581.52,200.24 966.2,584.92 3288.62,584.92

## Silkscreen, mask and mechanical layers (free items; w line width, h text height)
Top Overlay:
  text "V" at 3238.7,460 h60 r90
  text "DTR" at 953.7,430 h60
  text "C" at 3238.7,360 h60 r90
  text "Tx" at 858.7,350 h60
  text "Rx" at 803.7,280 h60
  text "D" at 3238.7,265 h60 r90
  text "V" at 723.7,215 h60
  text "G" at 3240.27,164.94 h60 r90
  text "CR" at 823.7,150 h60
  text "G" at 653.7,145 h60
  text "V" at 3298.7,145 h60 r90
  text "POW" at 365,140 h60
  text "BG" at -50,110 h60
  text "En" at 803.7,90 h60
  text "G" at 3123.7,85 h60 r90
  text "H" at 3298.7,35 h60 r90
  text "G" at 3298.7,-65 h60 r90
  text "G" at 2838.7,-160 h60
  text "R" at 3108.7,-160 h50
  text "POW" at 3173.7,-160 h40 r90
  text "Hall" at 3268.7,-235 h60 r90
  text "MOSI" at 2783.7,-265 h50
  text "SCK" at 3108.7,-275 h50
  text "-" at 848.7,-335 h100
  text "MISO" at 3113.7,-365 h50
  text "V" at 2838.7,-370 h60
  text "+" at 908.7,-415 h100
Bottom Overlay:
  circle w10: c1668.7,-17 r579
  circle w10: c1668.7,-16 r450
  text "Loggerhead" at 2878.7,500 h80
  text "V" at 3078.7,460 h60
  text "S" at 1693.7,425 h40 r90
  text "OpenTag3 v1.1" at 2878.7,415 h60
  text "C" at 3078.7,365 h60
  text "Tx" at 918.7,350 h60
  text "Rx" at 853.7,280 h60
  text "D" at 3078.7,265 h60
  text "V" at 3298.7,180 h60 r90
  text "V" at 693.7,160 h60
  text "G" at 3083.7,160 h60
  text "CR" at 913.7,150 h60
  text "POW" at 490,140 h60
  text "ON" at 1308.7,120 h70 r270
  text "En" at 858.7,100 h60
  text "G" at 648.7,90 h60
  text "G" at 3088.7,40 h60
  text "H" at 3298.7,35 h60 r90
  text "G" at 3298.7,-30 h60 r90
  text "V" at 3093.7,-60 h60
  text "VHF" at 3163.7,-120 h60 r90
  text "Hall" at 3268.7,-150 h60 r90
  text "BG" at 25,-175 h100
  text "-" at 848.7,-335 h100
  text "Charge" at 1028.7,-410 h60 r180
  text "+" at 908.7,-415 h100
  text "V" at 2478.7,-640 h60
  text "G" at 2573.7,-640 h60
  text "Tx2" at 2678.7,-640 h60
  text "Rx2" at 2788.7,-640 h60
  text "Bat" at 2998.7,-640 h60
Mechanical 1:
  lines w10: 567.47,207.53 959.95,600 3303.7,600 3303.7,-650 974.95,-650 565,-240.05 565,210 -65,210 -205,70 -205,-80 -45,-240 564.95,-240 628.7,-303.75

## Text inside footprints (layer, text, board x,y; h text height)
C5: Top Overlay "+" at 973.7,-390 h19.68 r90
C6: Top Overlay "+" at 1033.7,-280 h19.68 r180
C7: Top Overlay "+" at 1008.7,170 h19.68 r270
C8: Top Overlay "+" at 1019.7,330 h19.68 r270
C10: Top Overlay "+" at 1179.7,330 h19.68 r270
C13: Bottom Overlay "+" at 2118.7,-585 h19.68 r90
C20: Top Overlay "+" at 2463.7,-475 h19.68 r180